# EAGLE board microelf (EAGLE 4.11)
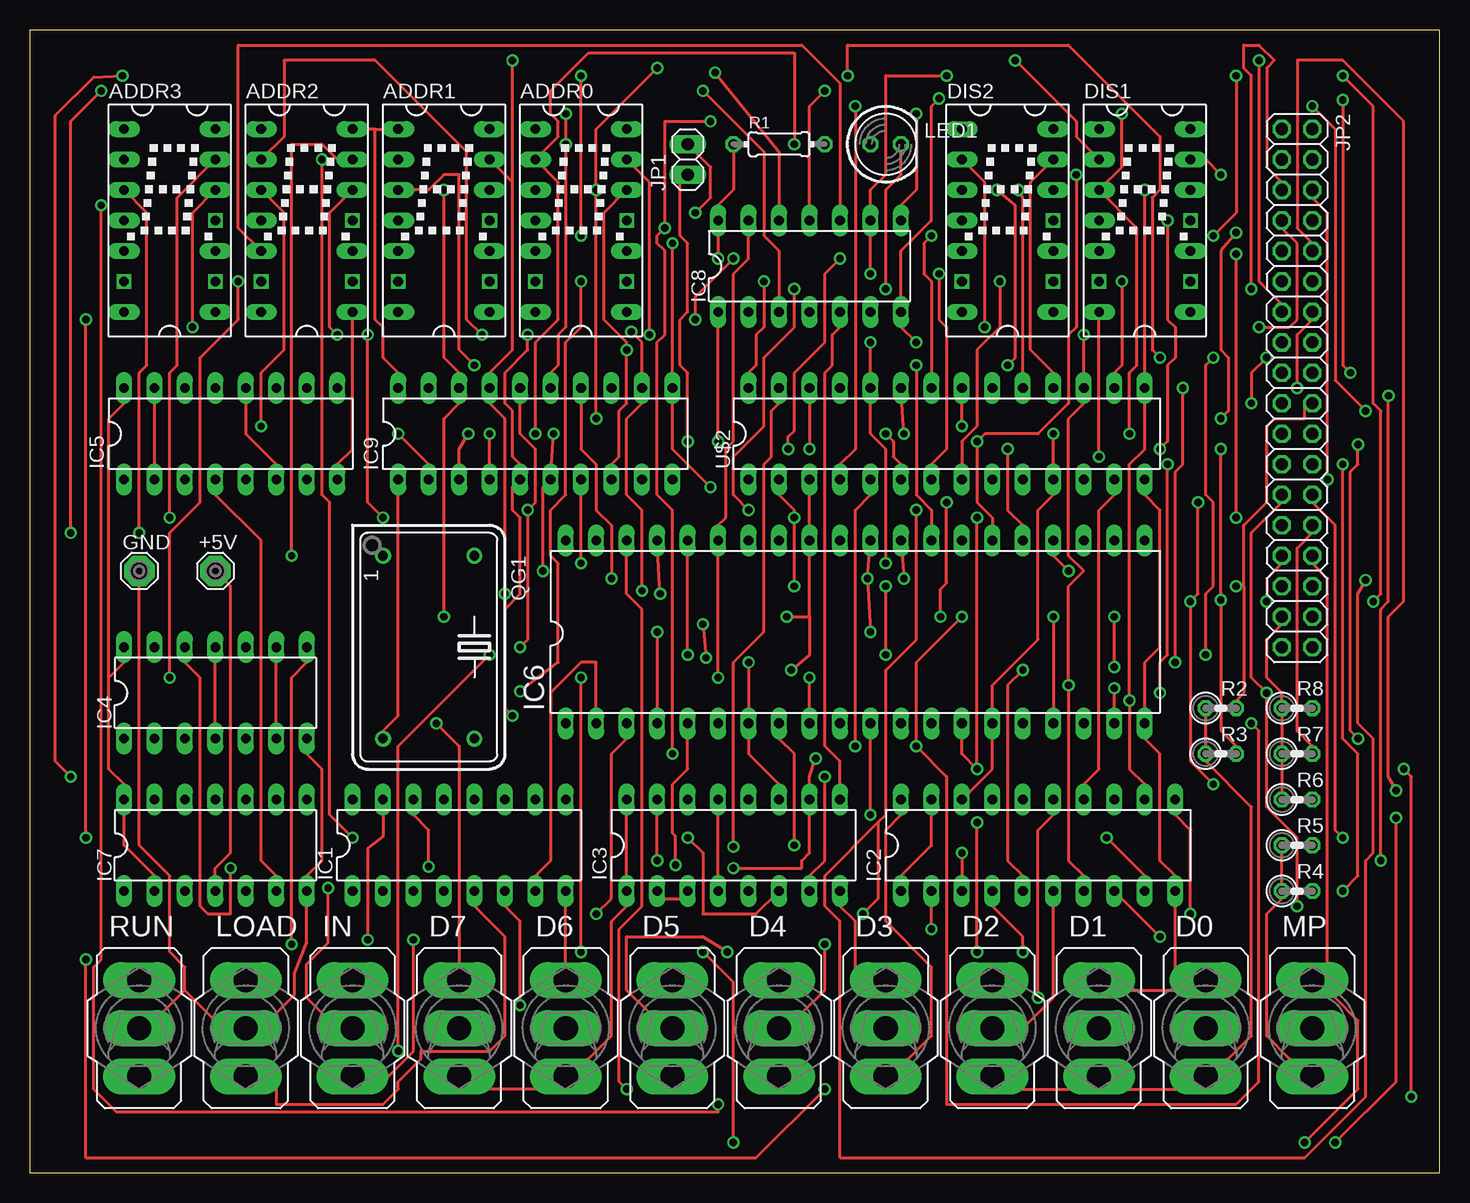
[diagram p0: board, top side]
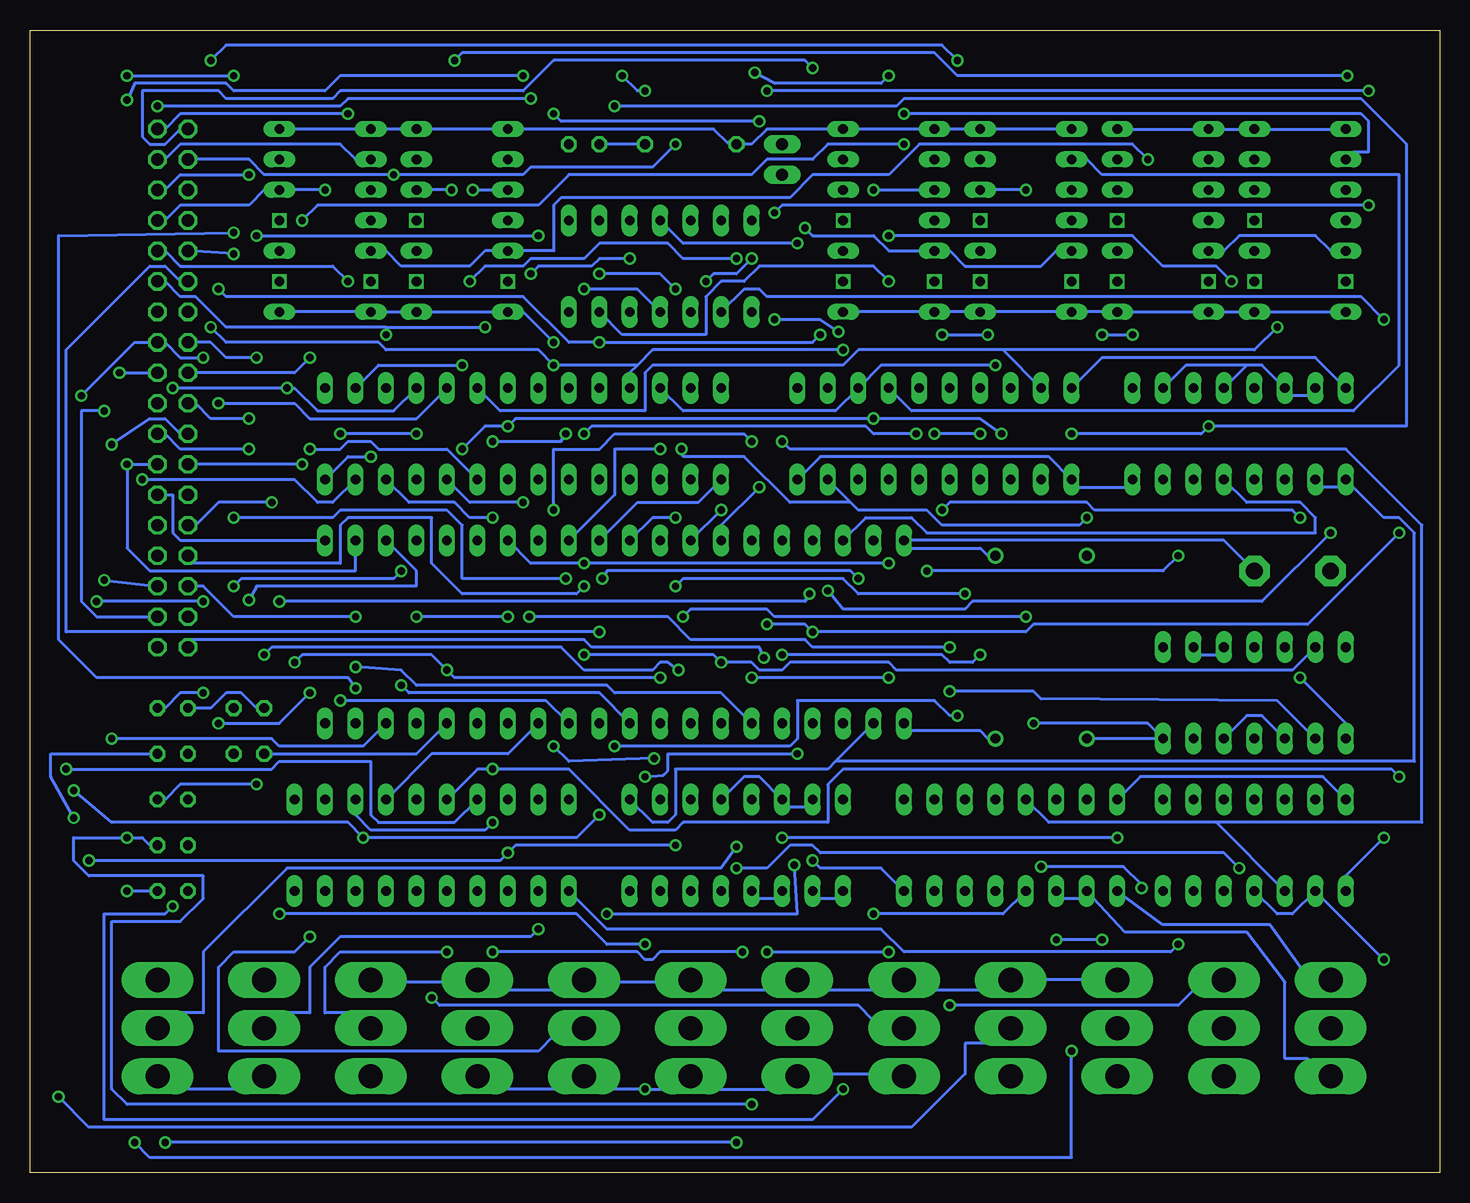
[diagram p1: board, bottom side, seen from below]

Size 117.53 x 95.24 mm. Coordinates in mm from the lower left corner, seen from the top.
Outline: 0,0 117.53,0 117.53,95.24 0,95.24 0,0
Copper layers (1*16): Top 0.035mm / dielectric 1.5mm / Bottom 0.035mm
Design rules "default": minimum track width 10mil, minimum drill 24mil, track to track 8mil, track to pad 8mil, pad to pad 8mil, via to via 8mil, smd to smd 8mil, copper to edge 40mil, drill to drill 8mil, minimum pad ring 10mil, minimum via ring 8mil, stop-mask expansion 4mil, vias tented up to drill 0mil, thermal gap 10mil

## Footprints (pad centres in the part's own frame; a part is rotated, then mirrored left to right if it is on the bottom)
SE14 = drill 1.397 pad 2.54 octagon: MP 0,0
HTIL311A = drill 0.813 long: 1 -3.81,7.62; 2 -3.81,5.08; 3 -3.81,2.54; 4 -3.81,0; 5 -3.81,-2.54; 7 -3.81,-7.62; 8 3.81,-7.62; 10 3.81,-2.54; 12 3.81,2.54; 13 3.81,5.08; 14 3.81,7.62
320-916 = drill 2.007 long: 1 0,4.013; 2 0,0; 3 0,-4.013
DIL16 = drill 0.813 long: 1 -8.89,-3.81; 2 -6.35,-3.81; 3 -3.81,-3.81; 4 -1.27,-3.81; 5 1.27,-3.81; 6 3.81,-3.81; 7 6.35,-3.81; 8 8.89,-3.81; 9 8.89,3.81; 10 6.35,3.81; 11 3.81,3.81; 12 1.27,3.81; 13 -1.27,3.81; 14 -3.81,3.81; 15 -6.35,3.81; 16 -8.89,3.81
DIL20 = drill 0.813 long: 1 -11.43,-3.81; 2 -8.89,-3.81; 3 -6.35,-3.81; 4 -3.81,-3.81; 5 -1.27,-3.81; 6 1.27,-3.81; 7 3.81,-3.81; 8 6.35,-3.81; 9 8.89,-3.81; 10 11.43,-3.81; 11 11.43,3.81; 12 8.89,3.81; 13 6.35,3.81; 14 3.81,3.81; 15 1.27,3.81; 16 -1.27,3.81; 17 -3.81,3.81; 18 -6.35,3.81; 19 -8.89,3.81; 20 -11.43,3.81
DIL14 = drill 0.813 long: 1 -7.62,-3.81; 2 -5.08,-3.81; 3 -2.54,-3.81; 4 0,-3.81; 5 2.54,-3.81; 6 5.08,-3.81; 7 7.62,-3.81; 8 7.62,3.81; 9 5.08,3.81; 10 2.54,3.81; 11 0,3.81; 12 -2.54,3.81; 13 -5.08,3.81; 14 -7.62,3.81
DIL40 = drill 0.813 long: 1 -24.13,-7.62; 2 -21.59,-7.62; 3 -19.05,-7.62; 4 -16.51,-7.62; 5 -13.97,-7.62; 6 -11.43,-7.62; 7 -8.89,-7.62; 8 -6.35,-7.62; 9 -3.81,-7.62; 10 -1.27,-7.62; 11 1.27,-7.62; 12 3.81,-7.62; 13 6.35,-7.62; 14 8.89,-7.62; 15 11.43,-7.62; 16 13.97,-7.62; 17 16.51,-7.62; 18 19.05,-7.62; 19 21.59,-7.62; 20 24.13,-7.62; 21 24.13,7.62; 22 21.59,7.62; 23 19.05,7.62; 24 16.51,7.62; 25 13.97,7.62; 26 11.43,7.62; 27 8.89,7.62; 28 6.35,7.62; 29 3.81,7.62; 30 1.27,7.62; 31 -1.27,7.62; 32 -3.81,7.62; 33 -6.35,7.62; 34 -8.89,7.62; 35 -11.43,7.62; 36 -13.97,7.62; 37 -16.51,7.62; 38 -19.05,7.62; 39 -21.59,7.62; 40 -24.13,7.62
1X02 = drill 1.016 long: 1 -1.27,0; 2 1.27,0
2X18 = drill 1.016 octagon: 1 -21.59,-1.27; 2 -21.59,1.27; 3 -19.05,-1.27; 4 -19.05,1.27; 5 -16.51,-1.27; 6 -16.51,1.27; 7 -13.97,-1.27; 8 -13.97,1.27; 9 -11.43,-1.27; 10 -11.43,1.27; 11 -8.89,-1.27; 12 -8.89,1.27; 13 -6.35,-1.27; 14 -6.35,1.27; 15 -3.81,-1.27; 16 -3.81,1.27; 17 -1.27,-1.27; 18 -1.27,1.27; 19 1.27,-1.27; 20 1.27,1.27; 21 3.81,-1.27; 22 3.81,1.27; 23 6.35,-1.27; 24 6.35,1.27; 25 8.89,-1.27; 26 8.89,1.27; 27 11.43,-1.27; 28 11.43,1.27; 29 13.97,-1.27; 30 13.97,1.27; 31 16.51,-1.27; 32 16.51,1.27; 33 19.05,-1.27; 34 19.05,1.27; 35 21.59,-1.27; 36 21.59,1.27
LED5MM = drill 0.813 octagon: A -1.27,0; K 1.27,0
DIL14S = drill 0.813 round: 1 -7.62,-3.81; 7 7.62,-3.81; 8 7.62,3.81; 14 -7.62,3.81
0204/7 = drill 0.813 octagon: 1 -3.81,0; 2 3.81,0
0207/2V = drill 0.813 octagon: 1 -1.27,0; 2 1.27,0
DIL28-3 = drill 0.813 long: 1 -16.51,-3.81; 2 -13.97,-3.81; 3 -11.43,-3.81; 4 -8.89,-3.81; 5 -6.35,-3.81; 6 -3.81,-3.81; 7 -1.27,-3.81; 8 1.27,-3.81; 9 3.81,-3.81; 10 6.35,-3.81; 11 8.89,-3.81; 12 11.43,-3.81; 13 13.97,-3.81; 14 16.51,-3.81; 15 16.51,3.81; 16 13.97,3.81; 17 11.43,3.81; 18 8.89,3.81; 19 6.35,3.81; 20 3.81,3.81; 21 1.27,3.81; 22 -1.27,3.81; 23 -3.81,3.81; 24 -6.35,3.81; 25 -8.89,3.81; 26 -11.43,3.81; 27 -13.97,3.81; 28 -16.51,3.81

## Placement (x,y rotation side)
+5V  SE14  [SE14]  15.46,50.16 0 top
ADDR0  HTIL311A  [HTIL311A]  45.94,79.37 0 top
ADDR1  HTIL311A  [HTIL311A]  34.51,79.37 0 top
ADDR2  HTIL311A  [HTIL311A]  23.08,79.37 0 top
ADDR3  HTIL311A  [HTIL311A]  11.65,79.37 0 top
D0  [320-916]  98.01,12.06 0 top
D1  [320-916]  89.12,12.06 0 top
D2  [320-916]  80.23,12.06 0 top
D3  [320-916]  71.34,12.06 0 top
D4  [320-916]  62.45,12.06 0 top
D5  [320-916]  53.56,12.06 0 top
D6  [320-916]  44.67,12.06 0 top
D7  [320-916]  35.78,12.06 0 top
DIS1  HTIL311A  [HTIL311A]  92.93,79.37 0 top
DIS2  HTIL311A  [HTIL311A]  81.5,79.37 0 top
GND  SE14  [SE14]  9.11,50.16 0 top
IC1  74LS279N  [DIL16]  35.78,27.3 0 top
IC2  74LS244N  [DIL20]  84.04,27.3 0 top
IC3  74LS151N  [DIL16]  58.64,27.3 0 top
IC4  74LS00N  [DIL14]  15.46,40 0 top
IC5  74LS367N  [DIL16]  16.73,61.59 0 top
IC6  CDP1802BCE  [DIL40]  68.8,45.08 0 top
IC7  74LS74N  [DIL14]  15.46,27.3 0 top
IC8  74LS04N  [DIL14]  64.99,75.56 0 top
IC9  74LS373N  [DIL20]  42.13,61.59 0 top
IN  [320-916]  26.89,12.06 0 top
JP1  [1X02]  54.83,84.45 90 top
JP2  [2X18]  105.63,65.4 270 top
LED1  [LED5MM]  71.34,85.72 0 top
LOAD  [320-916]  18,12.06 0 top
MP  [320-916]  106.9,12.06 0 top
QG1  [DIL14S]  33.24,43.81 270 top
R1  470  [0204/7]  62.45,85.72 0 top
R2  47k  [0207/2V]  99.28,38.73 0 top
R3  47k  [0207/2V]  99.28,34.92 0 top
R4  47k  [0207/2V]  105.63,23.49 0 top
R5  47k  [0207/2V]  105.63,27.3 0 top
R6  47k  [0207/2V]  105.63,31.11 0 top
R7  47k  [0207/2V]  105.63,34.92 0 top
R8  47k  [0207/2V]  105.63,38.73 0 top
RUN  [320-916]  9.11,12.06 0 top
U$2  CY7C199  [DIL28-3]  76.42,61.59 0 top

## Library data of the parts
+5V GND = solpad
ADDR0 ADDR1-ADDR3 DIS1 DIS2 = display-hp
D0 D1-D7 IN LOAD MP RUN = switch
IC1-IC5 IC7-IC9 = 74xx-us
IC6 U$2 = cdp
JP1 JP2 = pinhead
LED1 = led
QG1 = crystal
R1-R8 = rcl

## Nets
!5: ADDR3.12 IC9.19 U$2.20
A0: ADDR0.3 IC6.25 IC9.3 JP2.1 U$2.21
A1: ADDR0.2 IC6.26 IC9.4 JP2.3 U$2.23
A2: ADDR0.13 IC6.27 IC9.7 JP2.5 U$2.24
A3: ADDR0.12 IC6.28 IC9.8 JP2.7 U$2.25
A4: ADDR1.3 IC6.29 IC9.13 JP2.9 U$2.26
A5: ADDR1.2 IC6.30 IC9.14 JP2.11 U$2.1
A6: ADDR1.13 IC6.31 IC9.17 JP2.13 U$2.2
A7: ADDR1.12 IC6.32 IC9.18 JP2.15 U$2.3
A8: ADDR2.3 IC9.2 U$2.4
A9: ADDR2.2 IC9.5 U$2.5
A10: ADDR2.13 IC9.6 U$2.6
A11: ADDR2.12 IC9.9 U$2.7
A12: ADDR3.3 IC9.12 U$2.8
A13: ADDR3.2 IC9.15 U$2.9
A14: ADDR3.13 IC9.16 U$2.10
CLEAR: IC1.4 IC6.3
CLOCK: IC6.1 QG1.8
D0: DIS1.3 IC2.18 IC6.15 JP2.2 U$2.11
D1: DIS1.2 IC2.16 IC6.14 JP2.4 U$2.12
D2: DIS1.13 IC2.14 IC6.13 JP2.6 U$2.13
D3: DIS1.12 IC2.12 IC6.12 JP2.8 U$2.15
D4: DIS2.3 IC2.9 IC6.11 JP2.10 U$2.16
D5: DIS2.2 IC2.7 IC6.10 JP2.12 U$2.17
D6: DIS2.13 IC2.5 IC6.9 JP2.14 U$2.18
D7: DIS2.12 IC2.3 IC6.8 JP2.16 U$2.19
DMA_IN: IC5.5 IC6.38 JP2.25 R8.2
DMA_OUT: IC6.37 JP2.27 R6.2
EF1: IC6.24 JP2.20 R2.2
EF2: IC6.23 JP2.22 R3.2
EF3: IC6.22 JP2.24 R4.2
EF4: IC6.21 JP1.2 JP2.26 R5.2
GND: ADDR0.7 ADDR0.8 ADDR1.7 ADDR1.8 ADDR2.7 ADDR2.8 ADDR3.7 ADDR3.8 D0.1 D1.1 D2.1 D3.1 D4.1 D5.1 D6.1 D7.1 DIS1.7 DIS1.8 DIS2.7 DIS2.8 GND.MP IC1.8 IC2.10 IC3.8 IC3.12 IC3.14 IC3.15 IC4.7 IC5.8 IC6.20 IC7.7 IC8.7 IC9.1 IC9.10 JP2.34 LOAD.2 QG1.7 RUN.2 U$2.14
INQ: IC1.13 IC7.3 JP1.1
INT: IC6.36 JP2.28 R7.2
MRD: IC3.11 IC4.13 IC6.7 JP2.29 U$2.22
MWR: IC6.35 IC8.13 JP2.30 MP.1
N0: IC6.19 JP2.19
N1: IC6.18 JP2.21
N2: IC3.10 IC4.12 IC6.17 JP2.23
N$1: IC5.4 IC7.6
N$2: IN.3
N$9: IC4.6 IC4.9 IC4.10
N$12: ADDR0.5 ADDR1.5 IC3.7 IC8.8
N$13: IC4.2 IC8.6
N$14: ADDR2.5 ADDR3.5 IC8.10
N$15: IC1.1 RUN.1
N$16: IC1.2 IC1.3 RUN.3
N$17: IC4.1 IC8.12
N$18: IC4.3 IC4.5
N$19: IC4.4 IC4.11
N$34: D0.2 IC2.2
N$35: D1.2 IC2.4
N$36: D2.2 IC2.6
N$37: D3.2 IC2.8
N$38: D4.2 IC2.11
N$39: D5.2 IC2.13
N$40: D6.2 IC2.15
N$41: D7.2 IC2.17
N$46: IC1.6 LOAD.1
N$47: MP.2 U$2.27
N$48: IC1.5 LOAD.3
N$53: IC2.1 IC2.19 IC4.8
N$54: DIS1.5 DIS2.5 IC3.6
N$55: IC1.15
N$59: IC7.1 IC8.2
N$64: IC8.4 LED1.K
N$65: LED1.A R1.2
Q: IC6.4 IC8.3 JP2.35
S$21: IC1.14 IN.2
SC0: IC6.6 JP2.31
SC1: IC6.5 IC8.1 JP2.32
TPA: IC6.34 IC8.11 IC9.11 JP2.17
TPB: IC6.33 IC8.9 JP2.18
VCC: +5V.MP ADDR0.1 ADDR0.14 ADDR1.1 ADDR1.14 ADDR2.1 ADDR2.14 ADDR3.1 ADDR3.14 D0.3 D1.3 D2.3 D3.3 D4.3 D5.3 D6.3 D7.3 DIS1.1 DIS1.14 DIS2.1 DIS2.14 IC1.16 IC2.20 IC3.1 IC3.2 IC3.3 IC3.4 IC3.13 IC3.16 IC4.14 IC5.16 IC6.16 IC6.40 IC7.2 IC7.4 IC7.14 IC8.14 IC9.20 JP2.33 MP.3 QG1.14 R1.1 R2.1 R3.1 R4.1 R5.1 R6.1 R7.1 R8.1 U$2.28
WAIT: IC1.7 IC3.9 IC5.1 IC5.2 IC5.6 IC5.10 IC5.12 IC5.14 IC5.15 IC6.2 IC8.5

## Tracks (layer width: path | path; a pad name or v marks a point on that pad's centre or on a via)
!5  (via drill 0.61)
  Top 0.254: v13.55,70.48 13.55,80.01 ADDR3.12
  Bottom 0.254: 36.41,68.58 48.48,68.58 49.75,67.31 65.62,67.31 66.26,66.67 66.26,63.5 78.32,63.5 U$2.20 | 36.41,68.58 IC9.19 | v13.55,70.48 15.46,68.58 36.41,68.58
A0  (via drill 0.61)
  Top 0.254: v36.54,61.59 35.78,60.32 IC9.3 | v77.69,62.22 U$2.21 | v47.21,62.86 v47.21,81.91 47.21,86.99 v52.29,92.07 | v81.5,60.32 81.5,55.24 82.77,53.97 IC6.25
  Bottom 0.254: v36.54,61.59 38.32,62.86 v47.21,62.86 77.05,62.86 v77.69,62.22 79.59,62.22 v81.5,60.32 | v47.21,81.91 ADDR0.3 | v52.29,92.07 52.92,92.7 73.88,92.7 76.42,90.17 91.66,90.17 92.29,89.53 101.18,89.53 101.82,90.17 108.17,90.17 108.17,86.36 107.53,85.72 106.26,85.72 104.99,86.99 JP2.1
A1  (via drill 0.61)
  Top 0.254: v42.13,61.59 42.13,69.21 44.03,71.12 44.03,82.55 ADDR0.2 44.03,86.36 44.03,87.62 43.4,88.26 43.4,90.17 46.57,93.34 63.72,93.34 v63.72,85.72 | IC9.4 v38.32,61.59 | v72.86,61.59 U$2.23 | IC6.26 80.23,54.61 78.96,55.88 v78.96,60.95 79.59,61.59 84.04,61.59 86.58,64.13 86.58,69.84 87.21,70.48 v87.21,83.18
  Bottom 0.254: v38.32,61.59 v42.13,61.59 | v72.86,61.59 73.24,60.95 v78.96,60.95 | JP2.3 99.28,84.45 98.01,83.18 v87.21,83.18 76.42,83.18 75.78,83.81 65.62,83.81 v63.72,85.72
A2  (via drill 0.61)
  Top 0.254: v71.34,50.8 71.34,60.32 70.07,61.59 U$2.24 v70.07,69.21 | v45.94,50.8 IC9.7 | v51.65,69.84 51.65,82.55 ADDR0.13 | v101.82,73.66 101.82,91.44 101.18,92.07 101.18,93.98 102.45,93.98 103.72,92.7 103.09,92.07 103.09,83.81 104.36,82.55 JP2.5
  Bottom 0.254: IC6.27 75.78,50.8 v71.34,50.8 v45.94,50.8 | v51.65,69.84 52.29,69.21 v70.07,69.21 72.61,69.21 76.42,73.02 101.18,73.02 v101.82,73.66
A3  (via drill 0.61)
  Top 0.254: IC9.8 48.48,59.05 49.11,59.69 49.11,63.5 49.75,64.13 v49.75,68.58 49.75,69.21 47.84,71.12 47.84,80.01 ADDR0.12 | v73.88,67.31 73.88,56.51 75.15,55.24 IC6.28 | v102.45,70.48 104.99,70.48 105.63,71.12 105.63,77.47 104.36,78.73 JP2.7
  Bottom 0.254: 66.89,67.31 65.62,68.58 v49.75,68.58 | 66.89,67.31 67.53,66.67 U$2.25 | 66.89,67.31 v73.88,67.31 75.15,68.58 87.85,68.58 88.48,69.21 101.18,69.21 v102.45,70.48
A4  (via drill 0.61)
  Top 0.254: v37.05,67.31 35.78,68.58 35.78,83.18 34.51,83.18 33.24,81.91 ADDR1.3 | U$2.26 v64.99,60.32 | v100.55,54.61 v100.55,76.58 | IC6.29 v72.86,49.53
  Bottom 0.254: U$2.26 63.08,63.5 50.38,63.5 IC9.13 46.57,67.31 v37.05,67.31 | v64.99,60.32 68.8,60.32 68.8,56.51 IC6.29 | v100.55,54.61 92.29,54.61 91.66,55.24 82.77,55.24 81.5,53.97 81.5,49.53 v72.86,49.53 | v100.55,76.58 JP2.9
A5  (via drill 0.61)
  Top 0.254: v70.07,45.08 v69.81,49.53 IC6.30 | v48.48,49.53 48.48,53.97 47.21,55.24 47.21,59.05 45.94,60.32 IC9.14
  Bottom 0.254: IC9.14 44.03,63.5 7.2,63.5 3.39,67.31 3.39,83.18 28.16,83.18 29.43,84.45 ADDR1.2 | IC6.30 66.89,55.88 61.81,55.88 U$2.1 | v70.07,45.08 114.52,45.08 114.52,68.58 107.53,75.56 106.26,75.56 104.99,74.29 JP2.11 | v48.48,49.53 49.11,50.16 69.43,50.16 v69.81,49.53
A6  (via drill 0.61)
  Top 0.254: U$2.2 62.45,56.51 63.72,55.24 v63.72,54.61 v63.72,48.89 | 40.22,82.55 40.22,68.58 38.32,66.67 IC9.17 38.32,64.13 39.59,62.86 v39.59,48.25 | 40.22,82.55 ADDR1.13 | v102.45,92.7 102.45,74.29 104.36,72.39 JP2.13 | 40.22,82.55 v40.22,92.7
  Bottom 0.254: v63.72,54.61 65.62,54.61 IC6.31 | v102.45,92.7 101.18,93.98 41.49,93.98 v40.22,92.7 | v63.72,48.89 63.08,49.53 49.75,49.53 48.48,48.25 v39.59,48.25
A7  (via drill 0.61)
  Top 0.254: v34.51,81.91 34.51,67.94 35.78,66.67 IC9.18 35.78,64.13 34.51,62.86 v34.51,46.35 | U$2.3 IC6.32 64.99,46.35 | v98.64,67.94 98.01,67.31 98.01,56.51 98.64,55.88 98.64,48.89 98.01,48.25 v98.01,43.17 | v63.46,41.91 64.99,43.17 64.99,46.35 | v63.08,46.35 64.99,46.35
  Bottom 0.254: v34.51,81.91 ADDR1.12 | v98.64,67.94 101.18,67.94 102.45,69.21 JP2.15 | v98.01,43.17 97.37,43.81 73.24,43.81 71.34,41.91 65.62,41.91 64.99,42.54 64.35,42.54 v63.46,41.91 | v34.51,46.35 55.46,46.35 56.1,46.98 62.45,46.98 v63.08,46.35
A8  (via drill 0.61)
  Top 0.254: v19.27,62.22 19.27,66.67 21.17,68.58 21.17,80.01 ADDR2.3 | v30.7,61.59 33.24,59.05 IC9.2 | v68.8,88.9 68.8,60.32 67.53,59.05 U$2.4
  Bottom 0.254: v30.7,61.59 19.9,61.59 v19.27,62.22 2.76,62.22 2.76,85.72 6.57,89.53 44.67,89.53 45.3,88.9 v68.8,88.9
A9  (via drill 0.61)
  Top 0.254: v41.49,69.84 41.49,68.58 39.59,66.67 39.59,64.13 40.22,63.5 40.22,59.69 40.86,59.05 IC9.5 40.22,57.14 40.22,55.24 40.86,54.61 40.86,48.25 39.59,46.98 39.59,38.73 v40.22,38.09 | v37.68,69.84 36.41,71.12 36.41,85.09 28.79,92.7 21.17,92.7 21.17,86.36 ADDR2.2 | v68.8,35.55 68.8,55.24 70.07,56.51 U$2.5
  Bottom 0.254: v41.49,69.84 v37.68,69.84 | v68.8,35.55 54.19,35.55 53.56,36.19 53.56,39.36 42.13,39.36 40.86,38.09 v40.22,38.09
A10  (via drill 0.61)
  Top 0.254: v21.81,51.43 21.81,85.72 24.35,85.72 25.62,84.45 ADDR2.13 | v42.76,50.16 42.76,57.14 IC9.6 v43.65,61.59 | v71.34,61.59 71.97,60.95 71.97,59.69 72.61,59.05 U$2.6
  Bottom 0.254: v21.81,51.43 23.08,50.16 v42.76,50.16 | v71.34,61.59 70.7,62.22 47.84,62.22 47.21,61.59 v43.65,61.59
A11  (via drill 0.61)
  Top 0.254: v29.43,54.61 28.16,55.88 v28.16,69.84 | v25.62,69.84 24.98,70.48 24.98,80.01 ADDR2.12 | v75.78,74.92 75.78,71.12 76.42,70.48 76.42,60.32 75.15,59.05 U$2.7 | v67.53,76.2 66.26,74.92 66.26,69.21 63.72,66.67 63.72,61.84 63.21,61.34 v63.21,60.32
  Bottom 0.254: 49.11,55.88 48.48,55.24 42.76,55.24 41.49,53.97 30.06,53.97 v29.43,54.61 | v28.16,69.84 v25.62,69.84 | 49.11,55.88 IC9.9 | v75.78,74.92 75.15,75.56 70.7,75.56 70.07,76.2 v67.53,76.2 | v63.21,60.32 63.08,59.69 58,59.69 54.19,55.88 49.11,55.88
A12  (via drill 0.61)
  Top 0.254: v9.11,53.33 9.11,66.67 9.74,67.31 9.74,80.01 ADDR3.3 | v51.02,48.51 51.02,55.24 49.75,56.51 49.75,62.86 51.02,64.13 IC9.12 51.02,69.21 v50.13,70.1 | v80.86,74.29 80.86,70.48 78.96,68.58 78.96,62.22 77.69,60.95 U$2.8 | v58.64,76.2 55.46,73.02 v55.46,71.12
  Bottom 0.254: v9.11,53.33 14.82,47.62 38.95,47.62 39.59,46.98 49.75,46.98 v51.02,48.51 | v80.86,74.29 79.59,75.56 76.42,75.56 75.78,76.2 71.34,76.2 70.07,77.47 64.35,77.47 63.08,76.2 v58.64,76.2 | v55.46,71.12 51.65,71.12 v50.13,70.1
A13  (via drill 0.61)
  Top 0.254: v44.67,88.26 v44.67,85.72 44.67,70.48 44.03,69.84 44.03,67.31 43.4,66.67 IC9.15 | v94.2,60.32 94.83,60.95 94.83,67.31 95.47,67.94 95.47,70.48 94.83,71.12 v94.83,79.37
  Bottom 0.254: v44.67,88.26 6.57,88.26 5.93,87.62 5.93,85.09 7.2,85.09 ADDR3.2 | v94.2,60.32 91.66,60.32 91.02,60.95 89.12,60.95 88.48,60.32 82.77,60.32 U$2.9 | v94.83,79.37 93.56,80.64 75.15,80.64 72.61,83.18 57.37,83.18 56.1,84.45 52.29,84.45 51.02,85.72 v44.67,85.72
A14  (via drill 0.61)
  Top 0.254: v11.65,54.61 11.65,66.67 12.28,67.31 12.28,81.28 ADDR3.13 | IC9.16 40.86,61.59 42.13,60.32 42.13,55.88 v41.49,55.24 41.49,44.45 v40.86,43.81 | v75.91,46.35 75.91,48.64 76.42,49.14 v76.42,55.88
  Bottom 0.254: v11.65,54.61 12.28,55.24 28.79,55.24 29.43,55.88 40.86,55.88 v41.49,55.24 | v76.42,55.88 80.86,55.88 U$2.10 | v75.91,46.35 64.35,46.35 62.45,44.45 52.92,44.45 52.29,43.81 v40.86,43.81
CLEAR  (via drill 0.61)
  Top 0.254: v47.21,21.59 48.48,22.86 48.48,34.92 49.75,36.19 IC6.3
  Bottom 0.254: v47.21,21.59 36.41,21.59 IC1.4
CLOCK
  Bottom 0.254: QG1.8 37.68,36.19 38.32,36.83 44.03,36.83 IC6.1
D0  (via drill 0.61)
  Top 0.254: v91.02,88.26 91.02,83.81 DIS1.3 92.29,78.73 92.29,67.31 91.66,66.67 v91.66,61.59 | IC2.18 80.23,33.65 IC6.15 80.23,40.64 84.04,44.45 84.04,55.24 85.31,56.51 U$2.11 v85.31,61.59
  Bottom 0.254: v91.02,88.26 104.99,88.26 106.26,86.99 JP2.2 | v85.31,61.59 v91.66,61.59
D1  (via drill 0.61)
  Top 0.254: IC6.14 77.69,34.92 v78.96,33.65 v78.96,54.61 | v82.13,92.7 87.21,87.62 87.21,86.36 DIS1.2 | v7.71,91.44 5.3,91.31 2.12,88.13 2.12,34.28 v3.39,33.02
  Bottom 0.254: DIS1.2 90.39,84.45 91.66,85.72 104.99,85.72 106.26,84.45 JP2.4 | IC2.16 80.23,33.65 v78.96,33.65 72.61,33.65 67.53,28.57 63.72,28.57 63.08,29.21 51.02,29.21 51.02,32.38 49.75,33.65 4.03,33.65 v3.39,33.02 | v78.96,54.61 80.86,54.61 82.13,55.88 85.94,55.88 U$2.12 | v82.13,92.7 81.5,93.34 42.13,93.34 40.22,91.44 v7.71,91.44
D2  (via drill 0.61)
  Top 0.254: v99.28,83.18 98.01,84.45 DIS1.13 | U$2.13 90.39,56.51 89.12,55.24 89.12,33.65 87.85,32.38 IC2.14 | v108.17,57.78 108.17,80.01 106.9,81.28 JP2.6
  Bottom 0.254: v99.28,83.18 104.99,83.18 106.26,81.91 JP2.6 | IC6.13 77.69,34.92 84.04,34.92 IC2.14 | v108.17,57.78 95.47,57.78 93.56,55.88 92.29,55.88 U$2.13
D3  (via drill 0.61)
  Top 0.254: IC2.12 92.93,32.38 91.66,33.65 v91.66,39.36 91.66,59.05 92.93,60.32 U$2.15 v92.93,81.91
  Bottom 0.254: JP2.8 106.26,79.37 104.99,80.64 99.28,80.64 98.01,81.91 DIS1.12 v92.93,81.91 | v91.66,39.36 74.51,39.36 IC6.12
D4  (via drill 0.61)
  Top 0.254: v89.75,27.93 92.93,24.76 IC2.9 | v70.07,29.84 IC6.11 | v91.02,74.29 91.02,67.31 90.39,66.67 U$2.16 | v80.61,81.91 82.13,80.64 82.13,67.94 v81.5,67.31 | v113.88,31.87 113.25,33.02 113.25,46.35 114.52,47.62 114.52,87.62 109.44,92.7 105.63,92.7 105.63,78.73 106.9,77.47 JP2.10
  Bottom 0.254: v70.07,29.84 71.97,27.93 v89.75,27.93 91.02,29.21 110.71,29.21 v113.88,31.87 | v91.02,74.29 92.29,75.56 104.99,75.56 106.26,76.83 JP2.10 | v81.5,67.31 88.48,67.31 U$2.16 | v80.61,81.91 DIS2.3
D5  (via drill 0.61)
  Top 0.254: v79.59,70.48 79.59,82.55 DIS2.2 | IC2.7 87.85,24.76 86.58,26.03 v86.58,40.64 86.58,48.89 87.85,50.16 86.58,51.43 86.58,62.86 87.85,64.13 U$2.17 v87.85,69.84
  Bottom 0.254: 87.85,70.48 101.18,70.48 103.72,73.02 104.99,73.02 106.26,74.29 JP2.12 | 87.85,70.48 v79.59,70.48 | v86.58,40.64 85.94,40 70.07,40 IC6.10 | v87.85,69.84 87.85,70.48
D6  (via drill 0.61)
  Top 0.254: v82.77,41.91 81.5,40.64 81.5,26.03 82.77,24.76 IC2.5 | IC6.9 v64.99,41.27 | U$2.18 85.31,66.67 83.4,68.58 83.4,82.55 DIS2.13 | v105.63,65.4 105.63,69.84 106.9,71.12 JP2.14 | v95.47,42.54 95.47,58.42 96.1,59.05 v96.1,65.4
  Bottom 0.254: v64.99,41.27 82.13,41.27 v82.77,41.91 84.04,43.17 94.83,43.17 v95.47,42.54 | v105.63,65.4 v96.1,65.4 95.47,65.4 93.56,63.5 87.21,63.5 U$2.18
D7  (via drill 0.61)
  Top 0.254: v63.72,27.3 63.72,34.92 62.45,36.19 IC6.8 | v77.69,26.66 IC2.3 | v82.39,81.91 82.77,81.28 U$2.19 | v103.09,67.94 101.82,66.67 v101.82,64.13 | v112.61,26.03 112.61,46.98 113.25,47.62 v113.25,64.77
  Bottom 0.254: v63.72,27.3 77.05,27.3 v77.69,26.66 78.32,26.03 v112.61,26.03 | v82.39,81.91 DIS2.12 | v103.09,67.94 104.99,67.94 106.26,69.21 JP2.16 108.8,69.21 v113.25,64.77 | v101.82,64.13 95.47,64.13 94.2,62.86 85.31,62.86 U$2.19
DMA_IN  (via drill 0.61)
  Top 0.254: JP2.25 104.36,55.88 101.82,53.33 101.82,41.27 v103.09,40 103.09,30.48 105.63,27.93 v105.63,22.22 | v49.75,6.98 49.11,7.62 49.11,20.32 51.02,22.22 51.02,46.98 49.75,48.25 IC6.38
  Bottom 0.254: v103.09,40 104.99,40 106.26,38.73 R8.2 | IC5.5 16.09,55.88 11.65,55.88 10.38,54.61 10.38,53.33 42.76,53.33 44.03,54.61 47.84,54.61 IC6.38 | v105.63,22.22 106.26,21.59 111.34,21.59 111.34,4.44 52.29,4.44 v49.75,6.98
DMA_OUT  (via drill 0.61)
  Top 0.254: v97.37,55.88 97.37,48.25 v96.74,47.62 96.74,34.28 v98.64,32.38 | v52.54,48.25 IC6.37
  Bottom 0.254: v52.54,48.25 52.92,47.62 v96.74,47.62 | v97.37,55.88 101.82,55.88 103.72,53.97 JP2.27 | v98.64,32.38 104.99,32.38 106.26,31.11 R6.2
EF1  (via drill 0.61)
  Top 0.254: 101.18,48.89 101.18,53.97 103.09,55.88 103.09,62.22 103.72,62.86 106.26,62.86 106.26,64.13 JP2.20 | 101.18,48.89 101.18,40 100.55,39.36 R2.2 | v86.58,50.16 85.31,51.43 IC6.24 | v100.55,48.89 101.18,48.89
  Bottom 0.254: v86.58,50.16 87.21,49.53 99.91,49.53 v100.55,48.89
EF2  (via drill 0.61)
  Top 0.254: v99.28,60.32 v99.28,47.75 99.28,36.83 100.55,35.55 R3.2
  Bottom 0.254: v99.28,60.32 104.99,60.32 106.26,61.59 JP2.22 | v99.28,47.75 98.64,48.89 85.31,48.89 85.31,50.16 IC6.23
EF3  (via drill 0.61)
  Top 0.254: v109.44,23.49 110.71,24.76 110.71,34.92 109.44,36.19 v109.44,59.05
  Bottom 0.254: R4.2 v109.44,23.49 | JP2.24 v109.44,59.05 109.44,52.06 107.53,50.16 90.39,50.16 IC6.22
EF4  (via drill 0.61)
  Top 0.254: v109.44,27.93 108.8,28.57 108.8,53.97 106.9,55.88 JP2.26 | v55.46,80.01 56.73,81.28 56.73,83.81 JP1.2 | v5.93,80.64 5.93,17.77 5.3,17.14 5.3,6.98 7.2,5.08 57.37,5.08 v57.37,5.71
  Bottom 0.254: R5.2 107.53,27.3 108.17,27.93 v109.44,27.93 113.88,27.93 113.88,26.03 112.61,24.76 103.09,24.76 103.09,22.86 104.99,20.95 110.71,20.95 110.71,6.98 109.44,5.71 v57.37,5.71 | IC6.21 104.99,52.7 105.63,53.33 105.63,56.51 JP2.26 | v55.46,80.01 54.83,80.64 v5.93,80.64
GND  (via drill 0.61)
  Top 0.254: v111.34,63.5 108.8,66.03 108.8,86.99 v106.9,88.9 | v75.78,89.53 75.15,88.9 75.15,79.37 72.61,76.83 IC8.7 72.61,70.48 v73.88,69.21 | v89.12,59.69 DIS1.7 | U$2.14 92.93,56.51 94.2,55.24 94.2,43.81 92.93,42.54 IC6.20 92.93,36.19 94.2,34.92 94.2,26.03 95.47,24.76 IC2.10 95.47,17.14 D0.1 95.47,15.24 91.66,15.24 D1.1 | IC3.8 67.53,22.22 68.8,20.95 68.8,17.14 D3.1 | v52.29,26.03 IC3.15 | ADDR2.8 26.89,60.32 25.62,59.05 IC5.8 | D6.1 IC1.8 | D7.1 35.78,35.55 v33.87,37.46 | IC9.1 30.7,38.09 29.43,36.83 QG1.7 | IC4.7 23.08,34.92 24.35,33.65 24.35,26.03 23.08,24.76 IC7.7 23.08,19.17 22.06,16.63 22.06,14.85 19.27,12.06 LOAD.2 15.46,12.7 12.92,15.24 | GND.MP 9.11,27.3 11.65,24.76 11.65,18.41 12.92,17.14 12.92,15.24 | 12.92,15.24 11.01,13.33 RUN.2
  Bottom 0.254: JP2.34 111.98,46.35 113.25,47.62 113.25,63.5 v111.34,63.5 | v106.9,88.9 91.66,88.9 91.02,89.53 v75.78,89.53 | v73.88,69.21 76.42,71.75 DIS2.7 DIS2.8 DIS1.7 DIS1.8 | v89.12,59.69 91.02,59.69 U$2.14 | D1.1 86.58,15.87 82.77,15.87 D2.1 77.69,15.24 73.88,15.24 D3.1 68.8,15.87 64.99,15.87 D4.1 59.91,15.24 56.1,15.24 D5.1 51.02,15.24 47.21,15.24 D6.1 42.13,15.24 38.32,15.24 D7.1 | IC3.12 58,33.02 56.73,33.02 IC3.14 54.19,30.48 52.92,30.48 IC3.15 | ADDR0.8 ADDR0.7 ADDR1.8 ADDR1.7 ADDR2.8 ADDR2.7 ADDR3.8 ADDR3.7 | v52.29,26.03 51.65,25.39 46.57,25.39 IC1.8 | IC5.8 26.25,57.14 30.06,57.14 IC9.1 32.6,59.69 51.65,59.69 IC9.10 | v33.87,37.46 24.35,37.46 IC4.7 QG1.7
INQ  (via drill 0.61)
  Top 0.254: v54.83,60.95 54.83,66.67 54.19,67.31 54.19,71.12 54.83,71.75 54.83,77.47 54.19,78.1 54.19,82.55 JP1.1
  Bottom 0.254: 18.63,29.21 32.6,29.21 IC1.13 | 18.63,29.21 IC7.3 | v54.83,60.95 54.19,60.32 7.84,60.32 1.49,53.97 1.49,29.21 18.63,29.21
INT  (via drill 0.61)
  Top 0.254: v38.32,43.17 30.7,35.55 v30.7,10.16 | v108.8,2.54 113.88,7.62 v113.88,29.59 | v54.83,43.17 IC6.36 | JP2.28 106.9,53.33 105.63,52.06 105.63,36.83 106.9,35.55 R7.2
  Bottom 0.254: v54.83,43.17 41.49,43.17 40.86,42.54 38.95,42.54 v38.32,43.17 | v30.7,10.16 30.7,1.27 107.53,1.27 v108.8,2.54 | v113.88,29.59 115.79,33.02 115.79,34.92 R7.2
MRD  (via drill 0.61)
  Top 0.254: IC3.11 62.45,32.38 59.91,34.92 IC6.7 v59.91,42.54 | v75.15,78.1 74.51,77.47 74.51,74.92 75.15,74.29 U$2.22 | v98.64,78.1 100.55,80.01 v100.55,91.44 | v109.44,91.44 111.98,88.9 111.98,64.13 112.61,63.5 112.61,48.25 v111.98,47.62 | v103.09,47.62 103.09,49.53 104.36,50.8 JP2.29 | v71.34,43.17 v71.34,48.89
  Bottom 0.254: IC4.13 12.28,41.91 45.3,41.91 45.94,42.54 54.19,42.54 54.83,41.91 56.73,41.91 57.37,42.54 v59.91,42.54 60.54,43.17 v71.34,43.17 | v98.64,78.1 v75.15,78.1 | v109.44,91.44 v100.55,91.44 | v103.09,47.62 v111.98,47.62 | v71.34,48.89 71.97,48.25 81.5,48.25 84.04,50.8 84.04,54.61 91.02,54.61 91.66,53.97 91.66,50.8 104.36,50.8 JP2.29
MWR  (via drill 0.61)
  Top 0.254: IC8.13 59.91,76.2 58.64,74.92 58.64,60.95 58,60.32 58,54.61 57.37,53.97 IC6.35 v57.37,41.27 | JP2.30 106.9,50.8 108.17,49.53 108.17,17.14 MP.1 108.8,14.6 110.71,12.7 110.71,6.98 v106.26,2.54 | v45.94,18.41 v45.94,41.27 | v56.1,18.41 58.64,15.87 v58.64,2.54
  Bottom 0.254: v45.94,41.27 v57.37,41.27 | v56.1,18.41 v45.94,18.41 | v58.64,2.54 v106.26,2.54
N0  (via drill 0.61)
  Top 0.254: v100.55,78.35 99.28,76.83 99.28,68.58 99.91,67.94 99.91,63.5 v99.28,62.86 | IC6.19 v90.39,40.38
  Bottom 0.254: v90.39,40.38 91.02,41.27 111.98,41.27 115.15,44.45 115.15,78.1 v100.55,78.35 | v99.28,62.86 102.45,62.86 103.72,64.13 JP2.19
N1  (via drill 0.61)
  Top 0.254: v110.71,36.19 110.07,36.83 110.07,58.42 110.71,59.05 v110.71,60.7
  Bottom 0.254: v110.71,36.19 97.37,36.19 96.74,35.55 89.75,35.55 IC6.18 | v110.71,60.7 107.53,62.86 106.26,62.86 104.99,61.59 JP2.21
N2  (via drill 0.61)
  Top 0.254: v16.73,25.39 16.73,21.59 14.82,21.59 14.19,22.22 14.19,41.27 12.92,42.54 IC4.12 | v58.64,25.39 64.35,25.39 64.35,26.03 64.99,26.66 IC3.10 64.99,33.02 v65.49,34.54 | v77.69,46.35 73.88,42.54 v73.88,35.55 76.42,33.02 76.42,5.71 100.55,5.71 102.45,7.62 102.45,36.83 v101.82,37.46 | v85.31,46.35 IC6.17 | v94.83,59.05 94.83,43.17 94.2,42.54 v94.2,40
  Bottom 0.254: v16.73,25.39 18,26.66 51.65,26.66 52.29,27.3 54.19,27.3 56.1,25.39 v58.64,25.39 | v77.69,46.35 v85.31,46.35 | v73.88,35.55 72.61,34.28 v65.49,34.54 | v94.2,40 96.74,37.46 v101.82,37.46 | v94.83,59.05 JP2.23
N$1
  Top 0.254: IC7.6 20.54,24.76 19.27,26.03 19.27,52.7 15.46,56.51 IC5.4
N$2
  Top 0.254: 31.97,16.63 31.97,10.16 29.43,7.62 IN.3 | 31.97,16.63 31.97,17.14 | 31.97,16.63 31.97,19.43
N$9
  Top 0.254: IC4.6 IC4.9
  Bottom 0.254: IC4.10 18.63,43.17 19.9,43.17 IC4.9
N$12  (via drill 0.61)
  Top 0.254: v66.26,33.02 66.26,26.03 64.99,24.76 IC3.7 | v53.56,34.92 53.56,55.24 52.29,56.51 52.29,69.21 52.92,69.84 52.92,76.83 52.29,77.47 52.29,78.1 v52.92,78.73 52.92,87.62 v56.73,87.62 | v73.88,88.26 73.88,81.91 72.61,80.64 IC8.8
  Bottom 0.254: ADDR1.5 31.97,76.83 33.24,75.56 39.59,75.56 40.86,76.83 ADDR0.5 45.94,76.83 47.21,78.1 52.29,78.1 v52.92,78.73 | v66.26,33.02 64.73,33.14 64.35,33.52 64.35,34.92 v53.56,34.92 | v73.88,88.26 73.24,87.62 v56.73,87.62
N$13  (via drill 0.61)
  Top 0.254: v40.86,40.13 44.03,42.54 44.03,50.8 43.4,51.43 43.4,55.24 44.67,56.51 44.67,69.21 45.94,70.48 v45.94,74.29
  Bottom 0.254: v40.86,40.13 33.87,40.13 33.24,39.49 13.55,39.36 IC4.2 | v45.94,74.29 47.21,75.56 56.73,75.56 58,74.29 59.91,74.29 61.18,73.02 61.18,69.84 68.16,69.84 IC8.6
N$14
  Top 0.254: IC8.10 67.53,90.8 64.35,93.98 17.36,93.98 17.36,78.73 ADDR2.5
  Bottom 0.254: ADDR3.5 9.11,76.83 10.38,78.1 16.73,78.1 18,76.83 ADDR2.5
N$15
  Bottom 0.254: IC1.1 23.08,20.7 14.19,20.7 11.65,17.14 RUN.1
N$16
  Bottom 0.254: IC1.3 31.33,22.86 30.06,22.86 IC1.2 26.25,20.06 16.09,20.06 12.92,15.87 12.92,9.52 11.01,9.52 RUN.3
N$17  (via drill 0.61)
  Top 0.254: v11.65,41.27 11.65,53.33 14.19,55.88 14.19,67.94 17.36,71.12 v17.36,74.29 | v45.94,78.1 v45.94,91.44 | v57.11,91.69 62.45,85.09 IC8.12
  Bottom 0.254: v11.65,41.27 7.84,37.46 IC4.1 | v17.36,74.29 18.63,75.56 23.08,75.56 25.62,78.1 v45.94,78.1 | v45.94,91.44 46.57,90.8 55.46,90.8 v57.11,91.69
N$18
  Bottom 0.254: IC4.3 14.82,38.09 16.09,38.09 IC4.5
N$19
  Top 0.254: IC4.4 IC4.11
N$34  (via drill 0.61)
  Top 0.254: v75.15,20.32 IC2.2
  Bottom 0.254: v75.15,20.32 75.78,19.68 91.66,19.68 94.2,17.14 94.2,13.33 96.1,13.33 D0.2
N$35  (via drill 0.61)
  Top 0.254: v82.77,18.41 82.77,19.68 80.23,22.22 IC2.4
  Bottom 0.254: v82.77,18.41 91.66,18.41 92.93,17.14 92.93,13.33 91.02,13.33 D1.2
N$36
  Top 0.254: IC2.6 85.31,14.6 82.77,12.06 D2.2
N$37  (via drill 0.61)
  Top 0.254: v94.2,19.68 IC2.8
  Bottom 0.254: v94.2,19.68 95.47,18.41 100.55,18.41 101.82,17.14 101.82,10.16 75.15,10.16 73.88,11.43 D3.2
N$38  (via drill 0.61)
  Top 0.254: v96.74,21.59 96.74,28.57 95.47,29.84 IC2.11 | v66.26,19.05 66.26,15.24 64.35,13.33 D4.2
  Bottom 0.254: v96.74,21.59 71.97,21.59 69.43,19.05 v66.26,19.05
N$39  (via drill 0.61)
  Top 0.254: v78.96,18.41 v78.96,29.21 | v58.13,18.41 56.1,19.68 49.75,19.68 49.75,15.24 51.65,13.33 D5.2
  Bottom 0.254: v78.96,29.21 79.59,28.57 89.12,28.57 90.39,29.84 IC2.13 | v78.96,18.41 66.89,18.41 66.26,17.77 65.62,17.77 64.99,18.41 v58.13,18.41
N$40  (via drill 0.61)
  Top 0.254: v84.04,14.6 84.04,28.57 85.31,29.84 IC2.15
  Bottom 0.254: v84.04,14.6 83.4,13.96 48.48,13.96 47.21,12.7 D6.2
N$41  (via drill 0.61)
  Top 0.254: v114.52,33.65 115.15,33.02 v115.15,6.35
  Bottom 0.254: v114.52,33.65 97.37,33.65 96.74,34.28 89.12,34.28 89.12,29.84 88.48,29.21 82.13,29.21 IC2.17 | v115.15,6.35 112.61,3.81 44.03,3.81 39.59,8.25 39.59,10.79 37.68,10.79 D7.2
N$46  (via drill 0.61)
  Top 0.254: v40.86,13.96 40.86,20.95 39.59,22.22 IC1.6
  Bottom 0.254: v40.86,13.96 21.81,13.96 20.54,15.24 LOAD.1
N$47  (via drill 0.61)
  Top 0.254: v58.64,27.17 58.64,42.54 61.18,45.08 61.18,59.05 61.81,59.69 61.81,63.5 62.45,64.13 U$2.27
  Bottom 0.254: v58.64,27.17 59.91,25.39 96.1,25.39 103.09,18.41 103.09,13.33 104.99,13.33 MP.2
N$48
  Top 0.254: IC1.5 37.05,22.22 39.59,19.68 39.59,11.43 38.32,10.16 32.6,10.16 32.6,9.52 30.7,7.62 30.7,6.98 29.43,5.71 20.54,5.71 20.54,6.98 LOAD.3
N$53  (via drill 0.61)
  Top 0.254: IC2.1 72.61,24.76 75.15,27.3 IC2.19 | v21.81,19.05 21.81,41.27 23.08,42.54 IC4.8
  Bottom 0.254: v21.81,19.05 22.44,18.41 44.67,18.41 46.57,20.32 69.43,20.32 IC2.1
N$54  (via drill 0.61)
  Top 0.254: v54.83,27.93 56.1,26.66 56.1,21.59 60.54,21.59 IC3.6 | v26.89,27.93 24.98,29.84 24.98,55.88 24.35,56.51 v24.35,84.45
  Bottom 0.254: v26.89,27.93 v54.83,27.93 | v24.35,84.45 25.62,85.72 43.4,85.72 45.94,83.18 52.29,83.18 54.19,81.28 73.24,81.28 73.88,80.64 73.88,76.83 DIS2.5 79.59,76.83 80.86,75.56 86.58,75.56 87.85,76.83 DIS1.5
N$55  (via drill 0.61)
  Top 0.254: 29.43,29.84 IC1.15 29.43,28.06 28.16,27.05 v28.16,19.43
  Bottom 0.254: v28.16,19.43 v31.97,19.43
N$59  (via drill 0.61)
  Top 0.254: v4.66,27.93 v4.66,71.12
  Bottom 0.254: v4.66,27.93 7.84,24.76 IC7.1 | v4.66,71.12 6.57,73.02 56.1,73.02 56.73,73.66 58,73.66 IC8.2
N$64  (via drill 0.61)
  Top 0.254: v71.34,73.66 71.34,81.91 72.61,83.18 LED1.K
  Bottom 0.254: v71.34,73.66 66.89,73.66 IC8.4
N$65
  Bottom 0.254: R1.2 LED1.A
Q  (via drill 0.61)
  Top 0.254: v56.1,45.72 v56.35,42.92 | v52.29,45.08 IC6.4 | v56.1,90.17 61.18,85.09 61.18,78.1 62.45,76.83 IC8.3 | v5.93,90.17 3.39,87.62 v3.39,53.33
  Bottom 0.254: v56.1,45.72 52.92,45.72 v52.29,45.08 34.51,45.08 33.87,45.72 11.01,45.72 v3.39,53.33 | v56.35,42.92 56.73,43.81 70.7,43.81 71.34,44.45 104.36,44.45 JP2.35 | v5.93,90.17 v56.1,90.17
S$1  (via drill 0.81)
  other vias: 7.84,74.29
S$2  (via drill 0.81)
  other vias: 15.46,74.29
S$3  (via drill 0.81)
  other vias: 15.46,79.37
S$4  (via drill 0.81)
  other vias: 26.89,79.37
S$5  (via drill 0.81)
  other vias: 26.89,74.29
S$6  (via drill 0.81)
  other vias: 19.27,74.29
S$7  (via drill 0.81)
  other vias: 30.7,74.29
S$8  (via drill 0.81)
  other vias: 38.32,74.29
S$9  (via drill 0.81)
  other vias: 38.32,79.37
S$10  (via drill 0.81)
  other vias: 42.13,74.29
S$11  (via drill 0.81)
  other vias: 49.75,74.29
S$12  (via drill 0.81)
  other vias: 49.75,79.37
S$13  (via drill 0.81)
  other vias: 77.69,74.29
S$14  (via drill 0.81)
  other vias: 85.31,74.29
S$15  (via drill 0.81)
  other vias: 85.31,79.37
S$16  (via drill 0.81)
  other vias: 89.12,74.29
S$17  (via drill 0.81)
  other vias: 96.74,74.29
S$18  (via drill 0.81)
  other vias: 96.74,79.37
S$19
  Bottom 0.254: 35.78,16.12 26.89,16.12
S$21  (via drill 0.61)
  Top 0.254: IN.2 25.62,12.06 23.08,14.6 23.08,17.39 24.85,19.17 v24.85,23.74 | IC1.14 31.97,29.84 33.24,28.57 v33.24,25.52
  Bottom 0.254: v24.85,23.74 24.85,24 26.38,25.52 v33.24,25.52
SC0  (via drill 0.61)
  Top 0.254: v90.39,42.16 v90.39,46.35
  Bottom 0.254: v90.39,42.16 86.58,41.91 85.31,40.64 69.43,40.64 68.8,40 59.91,40 IC6.6 | v90.39,46.35 100.55,46.35 103.09,48.89 JP2.31
SC1  (via drill 0.61)
  Top 0.254: v53.81,25.65 53.81,28.06 53.56,28.32 53.56,32.38 54.83,33.65 IC6.5 | v69.43,21.59 70.7,22.86 70.7,29.21 | 70.7,29.21 71.34,29.84 71.34,41.91 73.88,44.45 v73.88,55.24 | v57.37,60.95 IC8.1 | v111.34,49.4 110.71,48.25 110.71,37.46 111.98,36.19 111.98,26.66 111.34,26.03 111.34,6.35 106.26,1.27 67.53,1.27 67.53,20.95 66.26,22.22 66.26,24.76 70.7,29.21
  Bottom 0.254: v53.81,25.65 53.56,21.59 v69.43,21.59 | v73.88,55.24 73.88,60.32 70.07,60.32 68.8,61.59 58,61.59 v57.37,60.95 | v111.34,49.4 JP2.32
TPA  (via drill 0.61)
  Top 0.254: v56.73,57.14 53.56,60.32 IC9.11 v53.56,77.47 | v94.2,67.94 93.56,68.58 93.56,81.28 94.2,81.91 94.2,86.36 86.58,93.98 68.16,93.98 v68.16,91.44 | v66.26,90.17 64.99,88.9 IC8.11
  Bottom 0.254: v56.73,57.14 59.91,53.97 IC6.34 | v53.56,77.47 63.08,77.47 IC8.11 | v94.2,67.94 95.47,66.67 JP2.17 | v68.16,91.44 66.89,90.17 v66.26,90.17
TPB  (via drill 0.61)
  Top 0.254: v59.91,55.24 58.64,56.51 58.64,59.69 61.18,62.22 61.18,67.94 63.72,70.48 v63.72,73.66 | v70.07,74.92 IC8.9 70.07,81.91 71.34,83.18 71.34,91.44 v76.42,91.44 | v110.07,66.67 109.44,67.31 v109.44,89.4
  Bottom 0.254: v63.72,73.66 64.99,74.92 v70.07,74.92 | v59.91,55.24 IC6.33 | v109.44,89.4 108.8,90.8 101.18,90.8 100.55,90.17 92.93,90.17 91.66,91.44 v76.42,91.44 | v110.07,66.67 JP2.18
VCC  (via drill 0.61)
  Top 0.254: IC3.3 54.19,22.86 52.92,22.86 IC3.2 | IC3.16 IC3.1 49.75,22.22 48.48,20.95 48.48,11.43 46.57,9.52 D6.3 42.13,6.98 38.32,6.98 D7.3 | IC3.4 IC3.13 | R6.1 R7.1 R8.1 104.36,40 103.09,41.27 103.09,44.45 104.36,45.72 JP2.33 | R2.1 R3.1 98.01,34.28 101.82,30.48 101.82,11.43 99.91,9.52 D0.3 95.47,6.98 91.66,6.98 D1.3 86.58,6.98 82.77,6.98 D2.3 | R5.1 R4.1 104.36,22.86 103.09,21.59 103.09,11.43 104.99,9.52 MP.3 | IC2.20 72.61,29.84 71.34,28.57 71.34,20.95 75.15,17.14 75.15,11.43 73.24,9.52 D3.3 | IC7.2 10.38,24.76 7.84,27.3 IC7.14 7.84,32.38 6.57,33.65 6.57,41.27 | 6.57,41.27 7.84,42.54 IC4.14 | 6.57,41.27 6.57,62.86 7.84,64.13 IC5.16 | +5V.MP 16.73,48.89 16.73,26.66 15.46,25.39 IC7.4 | 28.79,86.99 ADDR2.14 | 28.79,86.99 ADDR1.1 | R1.1 58.64,81.91 57.37,80.64 IC8.14 v57.37,76.2 | v61.18,74.29 61.18,70.48 60.54,69.84 60.54,67.31 59.91,66.67 U$2.28 | 28.79,86.99 28.79,71.12 29.43,70.48 29.43,67.94 30.7,66.67 IC9.20 | v66.26,6.98 60.54,1.27 4.66,1.27 v4.66,17.77
  Bottom 0.254: ADDR3.1 ADDR3.14 ADDR2.1 ADDR2.14 | ADDR1.1 ADDR1.14 ADDR0.1 ADDR0.14 56.1,86.99 57.37,85.72 R1.1 59.27,85.72 60.54,86.99 DIS2.1 DIS2.14 DIS1.1 DIS1.14 | IC3.1 50.38,22.86 51.65,22.86 IC3.2 | IC3.4 56.73,22.86 55.46,22.86 IC3.3 | D6.3 47.21,8.25 51.02,8.25 D5.3 56.1,6.98 59.91,6.98 D4.3 64.99,6.98 v66.26,6.98 68.8,6.98 D3.3 73.88,6.98 77.69,6.98 D2.3 | IC6.16 85.31,34.92 R3.1 | R8.1 102.45,38.73 101.18,40 99.91,40 98.64,38.73 R2.1 | MP.3 104.36,6.98 100.55,6.98 D0.3 | QG1.14 37.68,51.43 38.32,52.06 44.03,52.06 IC6.40 18,52.7 +5V.MP | IC7.4 13.55,21.59 12.28,21.59 IC7.2 v4.66,17.77 | IC1.16 24.98,33.02 9.74,33.02 IC7.14 | IC9.20 28.16,67.94 10.38,67.94 IC5.16 | v61.18,74.29 60.54,74.92 58.64,74.92 v57.37,76.2
WAIT
  Top 0.254: IC5.6 20.54,59.05 18,61.59 IC5.12 | IC5.2 IC5.15 | IC1.7 42.13,24.76 43.4,26.03 43.4,40 45.94,42.54 47.21,42.54 IC6.2 | IC8.5 67.53,70.48 66.89,69.84 66.89,67.31 66.26,66.67 66.26,35.55 67.53,34.28 IC3.9
  Bottom 0.254: IC5.2 9.74,57.14 8.47,57.14 IC5.1 4.66,54.61 3.39,54.61 2.12,53.33 2.12,34.28 50.38,34.28 | IC5.15 11.01,64.77 12.28,64.77 IC5.14 14.82,67.31 16.09,67.31 | 16.09,67.31 IC5.12 | 16.09,67.31 21.17,67.31 IC5.10 | 50.38,34.28 51.02,33.65 63.72,33.65 63.72,29.84 64.35,29.21 65.62,29.21 IC3.9 | 50.38,34.28 IC6.2